# EAGLE board ECU-V5 (EAGLE 7.6.0), part 1 of 2
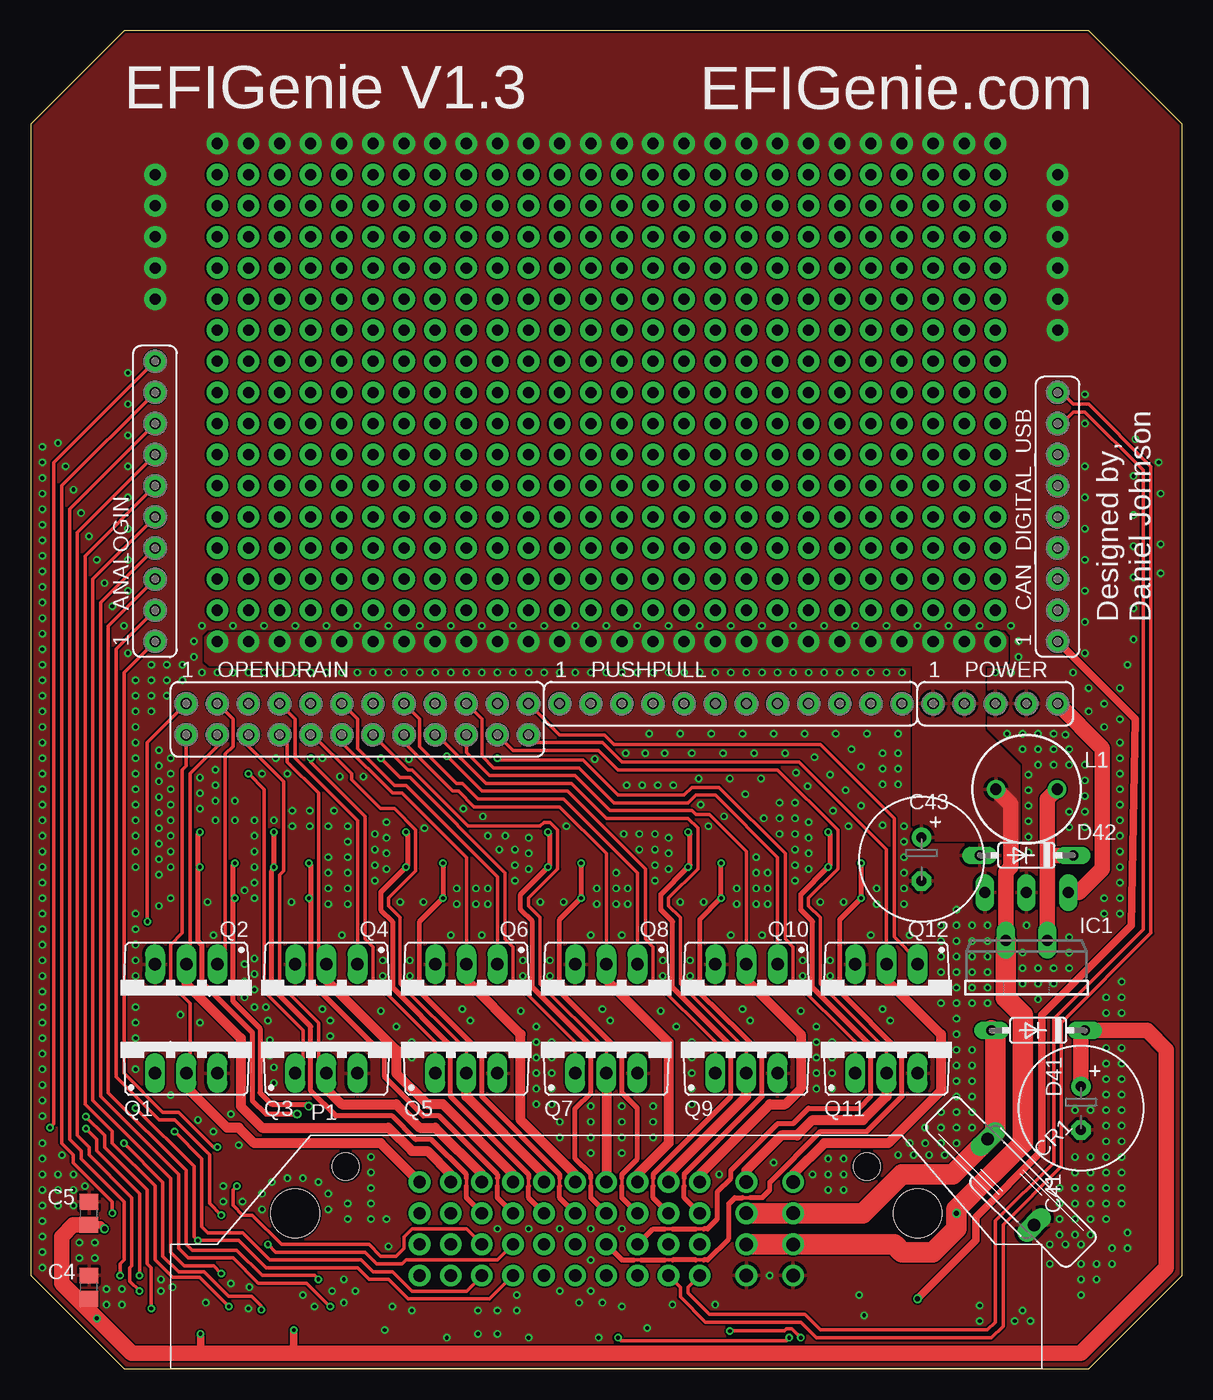
[diagram p0: board, top side]
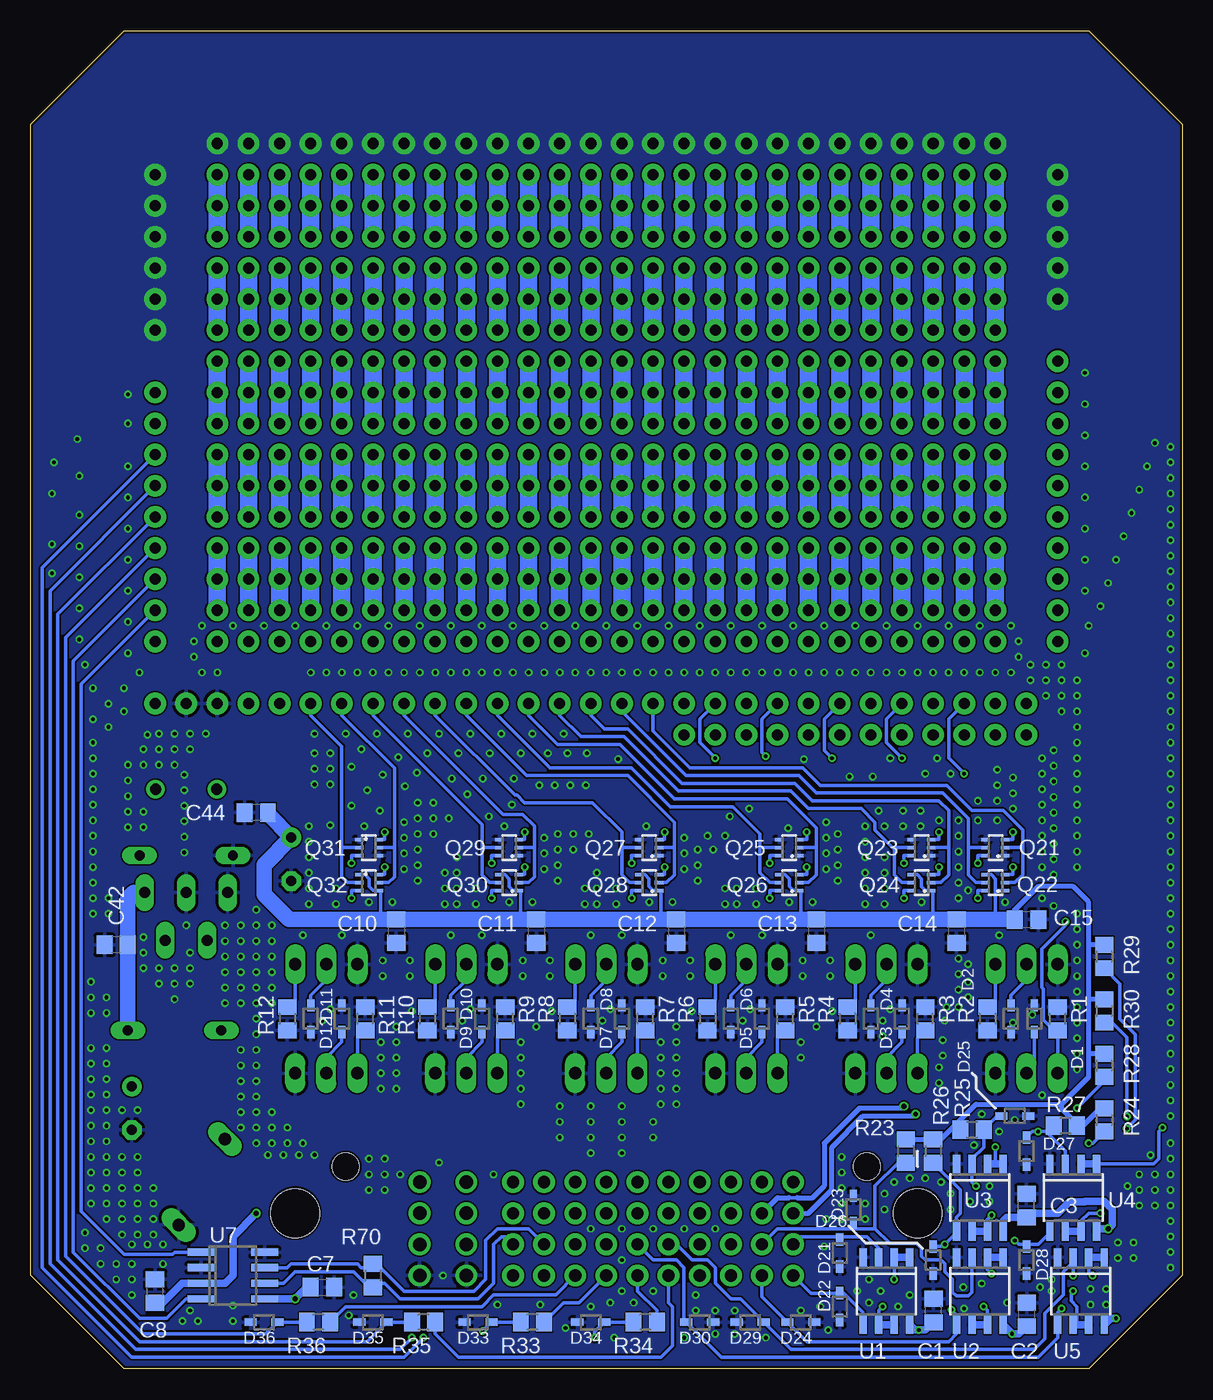
[diagram p1: board, bottom side, seen from below]

Size 93.98 x 109.22 mm. Coordinates in mm from the lower left corner, seen from the top.
Outline: 7.62,0 86.36,0 93.98,7.62 93.98,101.6 86.36,109.22 7.62,109.22 0,101.6 0,7.62 7.62,0
Copper layers (1*16): Top 0.035mm / dielectric 1.5mm / Bottom 0.035mm
Design rules "default *": minimum track width 5mil, minimum drill 12mil, track to track 5mil, track to pad 8mil, pad to pad 5mil, via to via 5mil, smd to smd 5mil, copper to edge 8mil, drill to drill 20mil, minimum pad ring 12mil, minimum via ring 6mil, stop-mask expansion 4mil, vias tented up to drill 13mil, thermal gap 10mil

## Footprints (pad centres in the part's own frame; a part is rotated, then mirrored left to right if it is on the bottom)
FE10 = drill 0.9 pad 1.778: 1 -11.43,0; 2 -8.89,0; 3 -6.35,0; 4 -3.81,0; 5 -1.27,0; 6 1.27,0; 7 3.81,0; 8 6.35,0; 9 8.89,0; 10 11.43,0
C0805 = smd 1.3 x 1.5: 1 -0.95,0; 2 0.95,0
E3,5-10 = drill 0.813 pad 1.6: + -1.778,0 | drill 0.813 pad 1.6 octagon: - 1.778,0
FE09 = drill 0.9 pad 1.778: 1 -10.16,0; 2 -7.62,0; 3 -5.08,0; 4 -2.54,0; 5 0,0; 6 2.54,0; 7 5.08,0; 8 7.62,0; 9 10.16,0
S14K40 = drill 1.016 long: 1 -1.143,-3.81; 2 1.143,3.81
SOD323 = smd 1 x 0.6: 1 -1.1,0; 2 1.1,0
DIODE_DO35-7 = drill 0.813 long: A 3.81,0; C -3.81,0
TO220-5 = drill 0.9 long: 1 -3.4,-8.4; 2 -1.7,-4.5; 3 0,-8.4; 4 1.7,-4.5; 5 3.4,-8.4
6000-XXXX-RC = drill 0.9 pad 1.422: 1 -2.5,0; 2 2.5,0
FE12-2 = drill 0.9 pad 1.778: 1 -13.97,1.27; 2 -13.97,-1.27; 3 -11.43,1.27; 4 -11.43,-1.27; 5 -8.89,1.27; 6 -8.89,-1.27; 7 -6.35,1.27; 8 -6.35,-1.27; 9 -3.81,1.27; 10 -3.81,-1.27; 11 -1.27,1.27; 12 -1.27,-1.27; 13 1.27,1.27; 14 1.27,-1.27; 15 3.81,1.27; 16 3.81,-1.27; 17 6.35,1.27; 18 6.35,-1.27; 19 8.89,1.27; 20 8.89,-1.27; 21 11.43,1.27; 22 11.43,-1.27; 23 13.97,1.27; 24 13.97,-1.27
ECU-CONNECTOR = drill 1 pad 1.778: A1 -15.24,3.81; A2 -15.24,1.27; A3 -15.24,-1.27; A4 -15.24,-3.81; B1 -12.7,3.81; B2 -12.7,1.27; B3 -12.7,-1.27; B4 -12.7,-3.81; C1 -10.16,3.81; C2 -10.16,1.27; C3 -10.16,-1.27; C4 -10.16,-3.81; D1 -7.62,3.81; D2 -7.62,1.27; D3 -7.62,-1.27; D4 -7.62,-3.81; E1 -5.08,3.81; E2 -5.08,1.27; E3 -5.08,-1.27; E4 -5.08,-3.81; F1 -2.54,3.81; F2 -2.54,1.27; F3 -2.54,-1.27; F4 -2.54,-3.81; G1 0,3.81; G2 0,1.27; G3 0,-1.27; G4 0,-3.81; H1 2.54,3.81; H2 2.54,1.27; H3 2.54,-1.27; H4 2.54,-3.81; J1 5.08,3.81; J2 5.08,1.27; J3 5.08,-1.27; J4 5.08,-3.81; K1 7.62,3.81; K2 7.62,1.27; K3 7.62,-1.27; K4 7.62,-3.81 | drill 1.1 pad 1.778: L1 11.43,3.81; L2 11.43,1.27; L3 11.43,-1.27; L4 11.43,-3.81; M1 15.24,3.81; M2 15.24,1.27; M3 15.24,-1.27; M4 15.24,-3.81 | hole 3.95: 25.4,1.27; -25.4,1.27 | hole 2.2: 21.273,5.08; -21.273,5.08
FE05-1 = drill 0.9 pad 1.778: 1 -5.08,0; 2 -2.54,0; 3 0,0; 4 2.54,0; 5 5.08,0
FE12 = drill 0.9 pad 1.778: 1 -13.97,0; 2 -11.43,0; 3 -8.89,0; 4 -6.35,0; 5 -3.81,0; 6 -1.27,0; 7 1.27,0; 8 3.81,0; 9 6.35,0; 10 8.89,0; 11 11.43,0; 12 13.97,0
TO220BV = drill 1.016 long: D 0,-2.54; G -2.54,-2.54; S 2.54,-2.54
SOT363_INFINEON = smd 0.3 x 0.7: 1 -0.65,-0.8; 2 0,-0.8; 3 0.65,-0.8; 4 0.65,0.8; 5 0,0.8; 6 -0.65,0.8
R0805 = smd 1.3 x 1.5: 1 -0.95,0; 2 0.95,0
SOIC8 = smd 0.6 x 1.5: 1 -1.905,-2.75; 2 -0.635,-2.75; 3 0.635,-2.75; 4 1.905,-2.75; 5 1.905,2.75; 6 0.635,2.75; 7 -0.635,2.75; 8 -1.905,2.75
SO-08 = smd 0.6 x 2.2: 1 -1.905,-2.6; 2 -0.635,-2.6; 3 0.635,-2.6; 4 1.905,-2.6; 5 1.905,2.6; 6 0.635,2.6; 7 -0.635,2.6; 8 -1.905,2.6

## Placement (x,y rotation side)
ANALOGIN  [FE10]  10.16,70.8 90 top
C1  [C0805]  20.29,4.76 90 bottom
C2  [C0805]  12.67,4.45 90 bottom
C3  [C0805]  12.7,13.34 90 bottom
C4  [C0805]  4.76,6.67 90 top
C5  [C0805]  4.76,12.7 90 top
C7  [C0805]  70.17,6.67 0 bottom
C8  [C0805]  83.82,6.35 90 bottom
C10  [C0805]  64.14,35.72 270 bottom
C11  [C0805]  52.7,35.72 270 bottom
C12  [C0805]  41.27,35.72 270 bottom
C13  [C0805]  29.84,35.72 270 bottom
C14  [C0805]  18.41,35.72 270 bottom
C15  [C0805]  12.7,36.67 0 bottom
C41  100uF  [E3,5-10]  85.72,21.27 270 top
C42  [C0805]  87,34.61 180 bottom
C43  1000uF  [E3,5-10]  72.71,41.59 270 top
C44  [C0805]  75.56,45.4 180 bottom
CAN_DIGITAL_USB  [FE09]  83.82,69.53 90 top
CR1  MOV-20D270K  [S14K40]  80.01,15.24 225 top
D1  VESD33C1-02V  [SOD323]  12.06,28.57 90 bottom
D2  VESD33C1-02V  [SOD323]  13.97,28.57 270 bottom
D3  VESD33C1-02V  [SOD323]  22.86,28.57 90 bottom
D4  VESD33C1-02V  [SOD323]  25.4,28.57 270 bottom
D5  VESD33C1-02V  [SOD323]  34.29,28.57 90 bottom
D6  VESD33C1-02V  [SOD323]  36.83,28.57 270 bottom
D7  VESD33C1-02V  [SOD323]  45.72,28.57 90 bottom
D8  VESD33C1-02V  [SOD323]  48.26,28.57 270 bottom
D9  VESD33C1-02V  [SOD323]  57.15,28.57 90 bottom
D10  VESD33C1-02V  [SOD323]  59.69,28.57 270 bottom
D11  VESD33C1-02V  [SOD323]  71.12,28.57 270 bottom
D12  VESD33C1-02V  [SOD323]  68.58,28.57 90 bottom
D21  VESD33C1-02V  [SOD323]  27.94,9.45 270 bottom
D22  VESD33C1-02V  [SOD323]  27.94,5.08 270 bottom
D23  VESD33C1-02V  [SOD323]  26.83,13.02 90 bottom
D24  VESD33C1-02V  [SOD323]  31.11,3.81 0 bottom
D25  VESD33C1-02V  [SOD323]  13.65,20.64 0 bottom
D26  VESD33C1-02V  [SOD323]  20.32,8.89 270 bottom
D27  VESD33C1-02V  [SOD323]  12.7,17.78 270 bottom
D28  VESD33C1-02V  [SOD323]  12.7,8.89 270 bottom
D29  VESD33C1-02V  [SOD323]  35.24,3.81 180 bottom
D30  VESD33C1-02V  [SOD323]  39.37,3.81 0 bottom
D33  VESD33C1-02V  [SOD323]  57.47,3.81 180 bottom
D34  VESD33C1-02V  [SOD323]  48.26,3.81 180 bottom
D35  VESD33C1-02V  [SOD323]  66.04,3.81 180 bottom
D36  VESD33C1-02V  [SOD323]  74.93,3.81 180 bottom
D41  1N5822  [DIODE_DO35-7]  82.23,27.62 180 top
D42  1N5822  [DIODE_DO35-7]  81.28,41.91 180 top
IC1  LM2576T  [TO220-5]  81.28,30.48 180 top
L1  100uH  [6000-XXXX-RC]  81.28,47.31 180 top
OPENDRAIN  [FE12-2]  26.67,53.02 0 top
P1  ECU-CONNECTOR  [ECU-CONNECTOR]  46.99,11.43 0 top
POWER  [FE05-1]  78.74,54.29 0 top
PUSHPULL  [FE12]  57.15,54.29 0 top
Q1  FQP30N06L  [TO220BV]  12.7,26.67 0 top
Q2  FQP30N06L  [TO220BV]  12.7,30.48 180 top
Q3  FQP30N06L  [TO220BV]  24.13,26.67 0 top
Q4  FQP30N06L  [TO220BV]  24.13,30.48 180 top
Q5  FQP30N06L  [TO220BV]  35.56,26.67 0 top
Q6  FQP30N06L  [TO220BV]  35.56,30.48 180 top
Q7  FQP30N06L  [TO220BV]  46.99,26.67 0 top
Q8  FQP30N06L  [TO220BV]  46.99,30.48 180 top
Q9  FQP30N06L  [TO220BV]  58.42,26.67 0 top
Q10  FQP30N06L  [TO220BV]  58.42,30.48 180 top
Q11  FQP30N06L  [TO220BV]  69.85,26.67 0 top
Q12  FQP30N06L  [TO220BV]  69.85,30.48 180 top
Q21  BSS138DW  [SOT363_INFINEON]  15.24,42.55 90 bottom
Q22  BSS84DW  [SOT363_INFINEON]  15.24,39.69 90 bottom
Q23  BSS138DW  [SOT363_INFINEON]  21.27,42.55 90 bottom
Q24  BSS84DW  [SOT363_INFINEON]  21.27,39.69 90 bottom
Q25  BSS138DW  [SOT363_INFINEON]  32.07,42.55 90 bottom
Q26  BSS84DW  [SOT363_INFINEON]  32.07,39.69 90 bottom
Q27  BSS138DW  [SOT363_INFINEON]  43.5,42.55 90 bottom
Q28  BSS84DW  [SOT363_INFINEON]  43.5,39.69 90 bottom
Q29  BSS138DW  [SOT363_INFINEON]  54.93,42.55 90 bottom
Q30  BSS84DW  [SOT363_INFINEON]  54.93,39.69 90 bottom
Q31  BSS138DW  [SOT363_INFINEON]  66.36,42.55 270 bottom
Q32  BSS84DW  [SOT363_INFINEON]  66.36,39.69 270 bottom
R1  10K  [R0805]  10.16,28.57 90 bottom
R2  10K  [R0805]  15.88,28.57 270 bottom
R3  10K  [R0805]  20.95,28.57 90 bottom
R4  10K  [R0805]  27.3,28.57 270 bottom
R5  10K  [R0805]  32.38,28.57 90 bottom
R6  10K  [R0805]  38.73,28.57 270 bottom
R7  10K  [R0805]  43.81,28.57 90 bottom
R8  10K  [R0805]  50.16,28.57 270 bottom
R9  10K  [R0805]  55.24,28.57 90 bottom
R10  10K  [R0805]  61.59,28.57 270 bottom
R11  10K  [R0805]  66.67,28.57 90 bottom
R12  10K  [R0805]  73.03,28.57 270 bottom
R23  10K  [R0805]  22.54,17.78 270 bottom
R24  10K  [R0805]  6.35,20.32 270 bottom
R25  10K  [R0805]  17.14,19.53 0 bottom
R26  10K  [R0805]  20.32,17.78 270 bottom
R27  10K  [R0805]  9.53,19.84 180 bottom
R28  10K  [R0805]  6.35,24.77 270 bottom
R29  10K  [R0805]  6.35,33.66 270 bottom
R30  10K  [R0805]  6.35,29.21 270 bottom
R33  10K  [R0805]  53.02,3.81 180 bottom
R34  10K  [R0805]  43.81,3.81 180 bottom
R35  10K  [R0805]  61.91,3.81 180 bottom
R36  10K  [R0805]  70.48,3.81 180 bottom
R70  120  [R0805]  66.04,7.62 270 bottom
U1  NCS20072DR2G  [SOIC8]  24.13,6.35 180 bottom
U2  NCS20072DR2G  [SOIC8]  16.51,6.35 180 bottom
U3  NCS20072DR2G  [SOIC8]  16.51,13.97 180 bottom
U4  NCS20072DR2G  [SOIC8]  8.89,13.97 180 bottom
U5  NCS20072DR2G  [SOIC8]  8.26,6.35 180 bottom
U7  ATA6561-GA  [SO-08]  77.47,7.62 270 bottom

## Library data of the parts
ANALOGIN CAN_DIGITAL_USB OPENDRAIN POWER PUSHPULL = con-lsta; OC_FARNELL: unknown; OC_NEWARK: unknown
C1-C5 C7 C8 C10-C15 C42 C44 L1 = rcl
C41 C43 R1-R12 R23-R30 R33-R36 R70 = resistor
CR1 = varistor
D1-D12 D21-D30 D33-D36 = zetex; MPN: CDSOD323-T05C; OC_FARNELL: 1824860; OC_NEWARK: 79R6078
D41 D42 = eagle-ltspice; SPICEMODEL: NONE; SPICEPREFIX: D; SPICETYPE: diode
IC1 = v-reg-3
P1 = ECUConnector
Q1-Q12 = transistor-power
Q21-Q32 = transistor-fet
U1-U5 = linear
U7 = microchip

## Nets
+3V3: C7.1 CAN_DIGITAL_USB.1 U7.5
+5V: C8.1 C10.1 C11.1 C12.1 C13.1 C14.1 C15.1 C43.+ C44.1 IC1.4 L1.2 P1.L3 P1.M3 POWER.1 POWER.2 Q22.1 Q22.4 Q24.1 Q24.4 Q26.1 Q26.4 Q28.1 Q28.4 Q30.1 Q30.4 Q32.1 Q32.4 R23.1 R24.1 R25.1 R26.1 R27.1 R28.1 R29.1 R30.1 U7.3
+12V: C1.1 C2.1 C3.1 C4.1 C5.1 C41.+ C42.1 D41.C IC1.1 POWER.5 U1.8 U2.8 U3.8 U4.8 U5.8
+15V: CR1.1 D41.A P1.L2 P1.M2
A1: D21.1 P1.A3 U1.3
A2: D22.1 P1.A4 U1.5
A3: D23.1 P1.B3 R23.2 U2.3
A4: D24.1 P1.B4 R24.2 U2.5
A5: D25.1 P1.C3 R25.2 U3.3
A6: D26.1 P1.D3 R26.2 U3.5
A7: D27.1 P1.C4 R27.2 U4.3
A8: D28.1 P1.D4 R28.2 U4.5
A9: D29.1 P1.E3 R29.2 U5.3
A10: D30.1 P1.F3 R30.2 U5.5
BOOT0: P1.H4 R36.1
CANH: P1.J3 R70.1 U7.7
CANL: P1.K3 R70.2 U7.6
GND: C1.2 C2.2 C3.2 C4.2 C5.2 C7.2 C8.2 C10.2 C11.2 C12.2 C13.2 C14.2 C15.2 C41.- C42.2 C43.- C44.2 CR1.2 D1.2 D2.2 D3.2 D4.2 D5.2 D6.2 D7.2 D8.2 D9.2 D10.2 D11.2 D12.2 D21.2 D22.2 D23.2 D24.2 D25.2 D26.2 D27.2 D28.2 D29.2 D30.2 D33.2 D34.2 D35.2 D36.2 D42.A IC1.3 IC1.5 P1.L4 P1.M4 POWER.3 POWER.4 Q1.S Q2.S Q3.S Q4.S Q5.S Q6.S Q7.S Q8.S Q9.S Q10.S Q11.S Q12.S Q21.1 Q21.4 Q23.1 Q23.4 Q25.1 Q25.4 Q27.1 Q27.4 Q29.1 Q29.4 Q31.1 Q31.4 R1.2 R2.2 R3.2 R4.2 R5.2 R6.2 R7.2 R8.2 R9.2 R10.2 R11.2 R12.2 U1.4 U2.4 U3.4 U4.4 U5.4 U7.2 U7.8
I1: P1.G4 R33.1
I2: P1.F4 R34.1
I3: P1.E4 R35.1
N$77: D42.C IC1.2 L1.1
OD1: D1.1 OPENDRAIN.2 P1.A1 Q1.D
OD2: D2.1 OPENDRAIN.4 P1.B1 Q2.D
OD3: D3.1 OPENDRAIN.6 P1.C1 Q3.D
OD4: D4.1 OPENDRAIN.8 P1.D1 Q4.D
OD5: D5.1 OPENDRAIN.10 P1.E1 Q5.D
OD6: D6.1 OPENDRAIN.12 P1.F1 Q6.D
OD7: D7.1 OPENDRAIN.14 P1.G1 Q7.D
OD8: D8.1 OPENDRAIN.16 P1.H1 Q8.D
OD9: D9.1 OPENDRAIN.18 P1.J1 Q9.D
OD10: D10.1 OPENDRAIN.20 P1.K1 Q10.D
OD11: D12.1 OPENDRAIN.22 P1.L1 Q11.D
OD12: D11.1 OPENDRAIN.24 P1.M1 Q12.D
PP1: P1.A2 Q21.3 Q22.3
PP2: P1.B2 Q21.6 Q22.6
PP3: P1.C2 Q23.3 Q24.3
PP4: P1.D2 Q23.6 Q24.6
PP5: P1.E2 Q25.3 Q26.3
PP6: P1.F2 Q25.6 Q26.6
PP7: P1.G2 Q27.3 Q28.3
PP8: P1.H2 Q27.6 Q28.6
PP9: P1.J2 Q29.3 Q30.3
PP10: P1.K2 Q29.6 Q30.6
PP11: P1.G3 Q31.3 Q32.3
PP12: P1.H3 Q31.6 Q32.6
USB-D+: CAN_DIGITAL_USB.8 P1.K4
USB-D-: CAN_DIGITAL_USB.9 P1.J4
µC_A1: ANALOGIN.3 U1.1 U1.2
µC_A2: ANALOGIN.4 U1.6 U1.7
µC_A3: ANALOGIN.5 U2.1 U2.2
µC_A4: ANALOGIN.6 U2.6 U2.7
µC_A5: ANALOGIN.1 U3.1 U3.2
µC_A6: ANALOGIN.2 U3.6 U3.7
µC_A7: ANALOGIN.10 U4.1 U4.2
µC_A8: ANALOGIN.9 U4.6 U4.7
µC_A9: ANALOGIN.8 U5.1 U5.2
µC_A10: ANALOGIN.7 U5.6 U5.7
µC_BOOT0: CAN_DIGITAL_USB.4 D36.1 R36.2
µC_CAN_RX: CAN_DIGITAL_USB.3 U7.4
µC_CAN_TX: CAN_DIGITAL_USB.2 U7.1
µC_I1: CAN_DIGITAL_USB.6 D33.1 R33.2
µC_I2: CAN_DIGITAL_USB.7 D34.1 R34.2
µC_I3: CAN_DIGITAL_USB.5 D35.1 R35.2
µC_OD1: OPENDRAIN.1 Q1.G R1.1
µC_OD2: OPENDRAIN.3 Q2.G R2.1
µC_OD3: OPENDRAIN.5 Q3.G R3.1
µC_OD4: OPENDRAIN.7 Q4.G R4.1
µC_OD5: OPENDRAIN.9 Q5.G R5.1
µC_OD6: OPENDRAIN.11 Q6.G R6.1
µC_OD7: OPENDRAIN.13 Q7.G R7.1
µC_OD8: OPENDRAIN.15 Q8.G R8.1
µC_OD9: OPENDRAIN.17 Q9.G R9.1
µC_OD10: OPENDRAIN.19 Q10.G R10.1
µC_OD11: OPENDRAIN.21 Q11.G R11.1
µC_OD12: OPENDRAIN.23 Q12.G R12.1
µC_PP1: PUSHPULL.2 Q21.5 Q22.5
µC_PP2: PUSHPULL.1 Q21.2 Q22.2
µC_PP3: PUSHPULL.4 Q23.5 Q24.5
µC_PP4: PUSHPULL.3 Q23.2 Q24.2
µC_PP5: PUSHPULL.6 Q25.5 Q26.5
µC_PP6: PUSHPULL.5 Q25.2 Q26.2
µC_PP7: PUSHPULL.8 Q27.5 Q28.5
µC_PP8: PUSHPULL.7 Q27.2 Q28.2
µC_PP9: PUSHPULL.10 Q29.5 Q30.5
µC_PP10: PUSHPULL.9 Q29.2 Q30.2
µC_PP11: PUSHPULL.11 Q31.5 Q32.5
µC_PP12: PUSHPULL.12 Q31.2 Q32.2